# Altium PCB FMC-320U-B3.PcbDoc
Units mil, origin at the board's own origin, x right, y up, seen from the top; angles counter-clockwise.
Board outline 3385.83 x 3385.83 mil, 2 copper layers (Top Layer, Bottom Layer), stack 65.8 mil thick; 57 components, 35 nets, 179 pads, 49 vias.
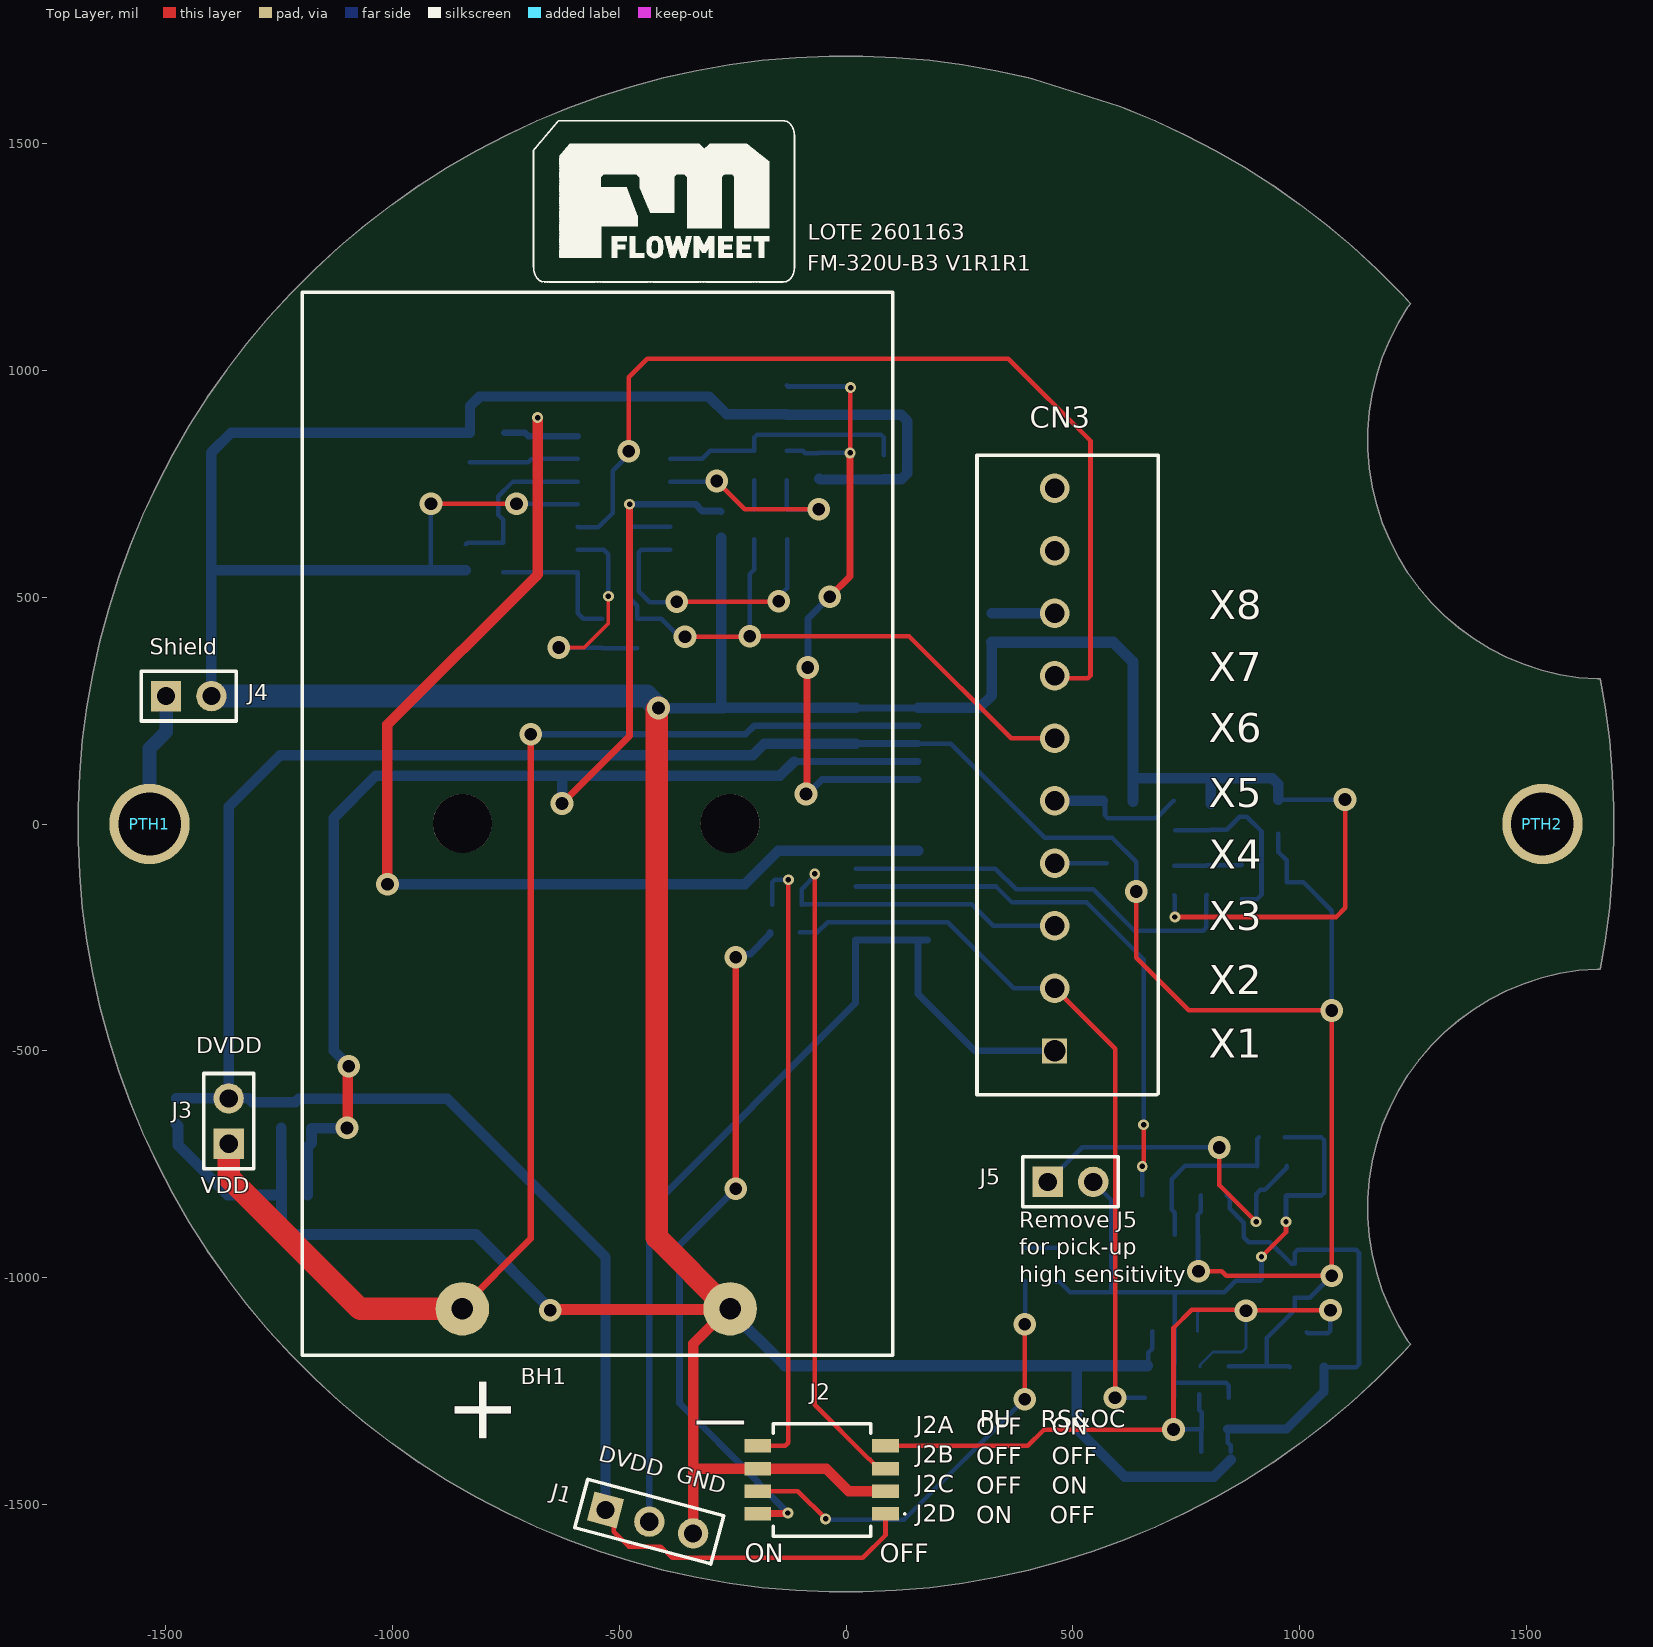
[diagram p0: Top Layer view]
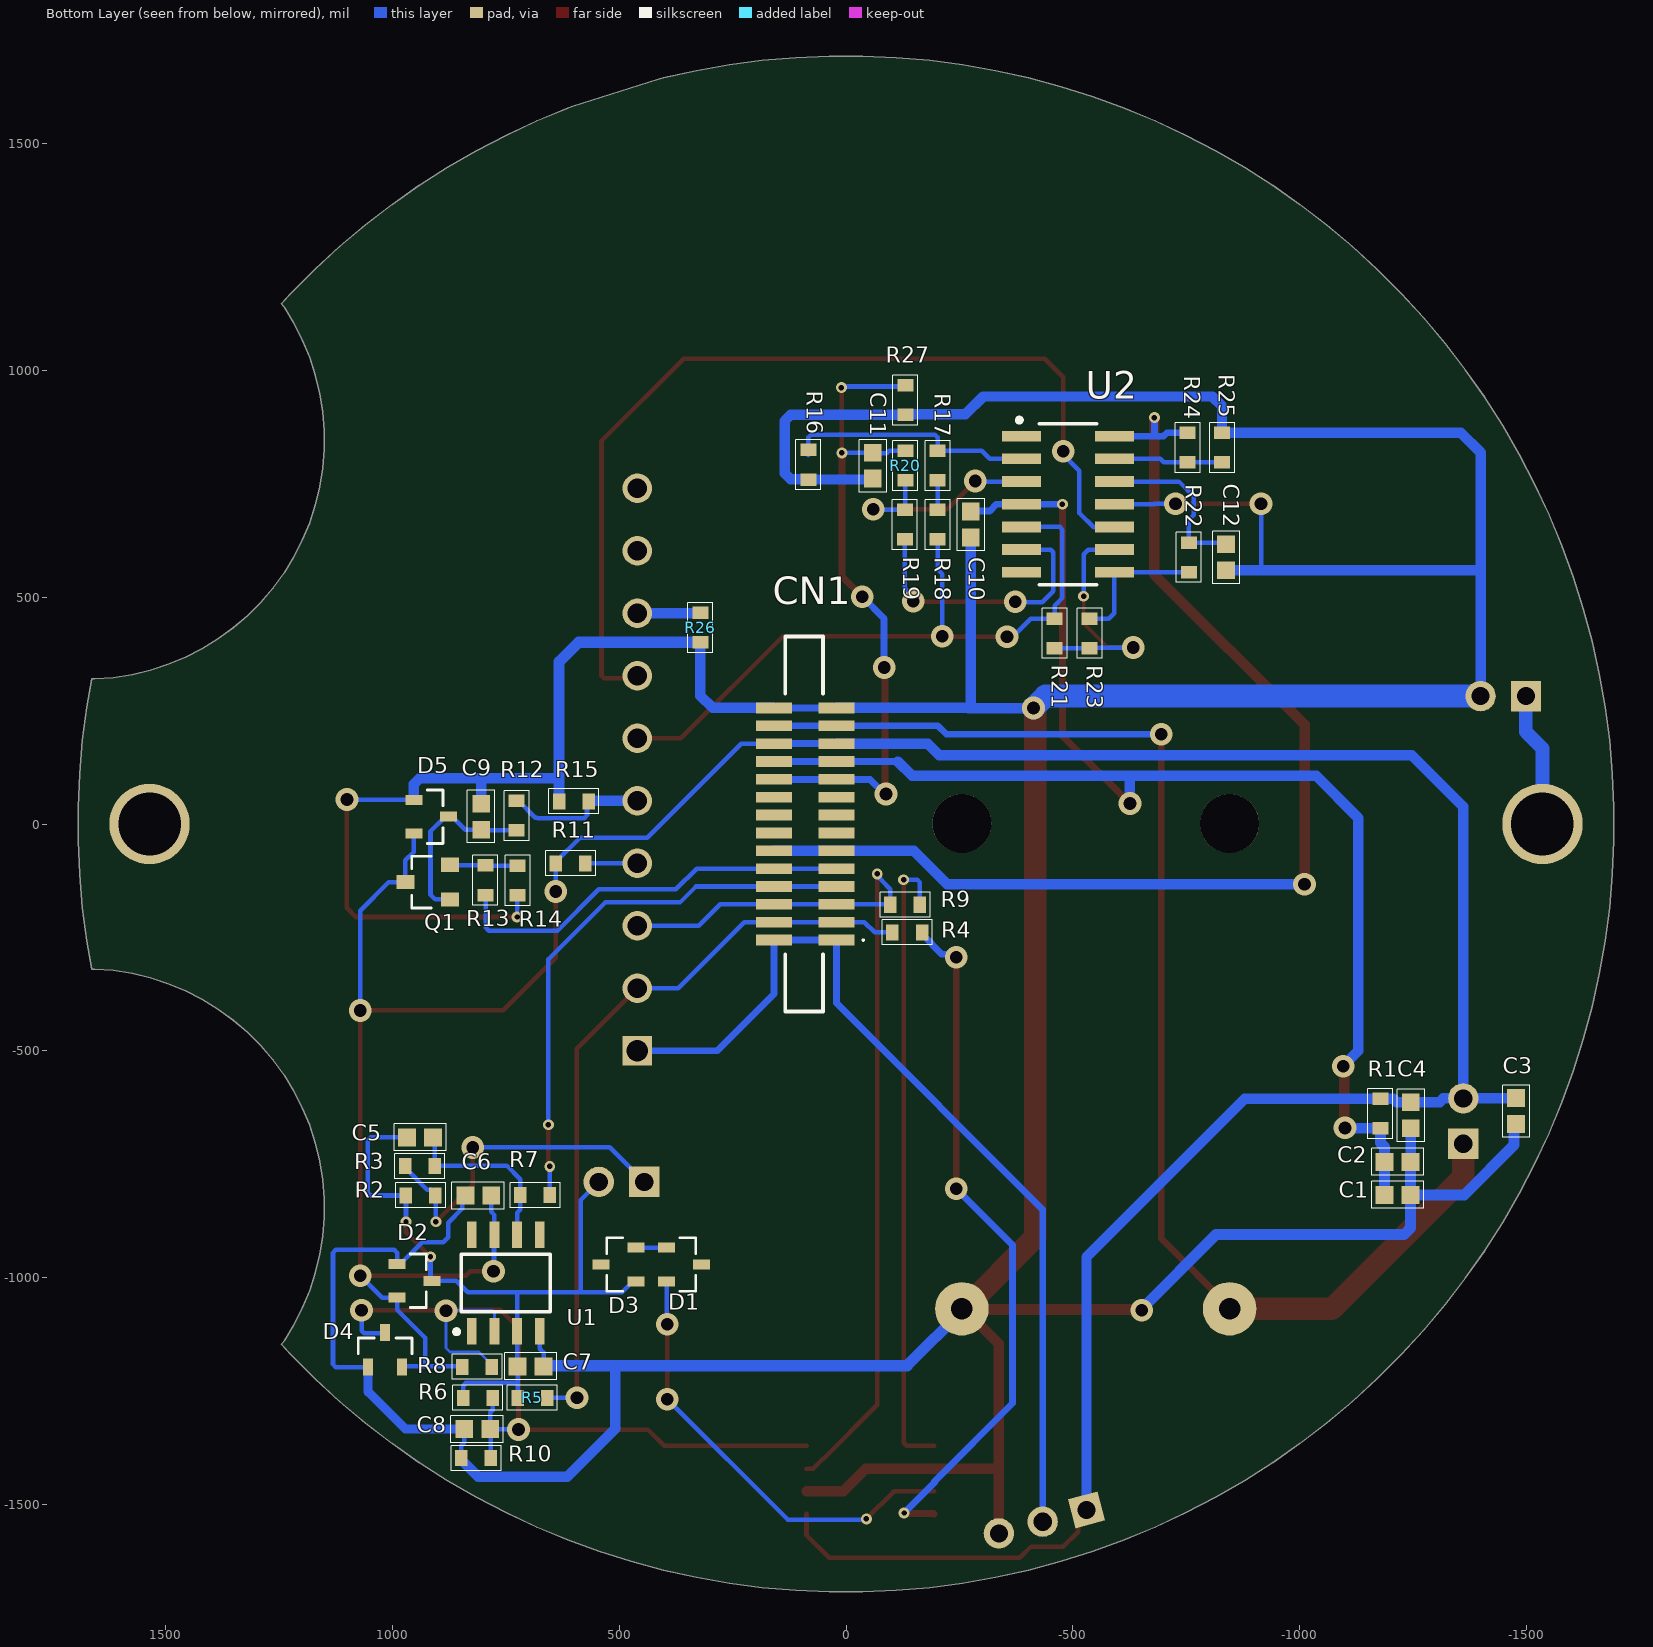
[diagram p1: Bottom Layer view, seen from below]
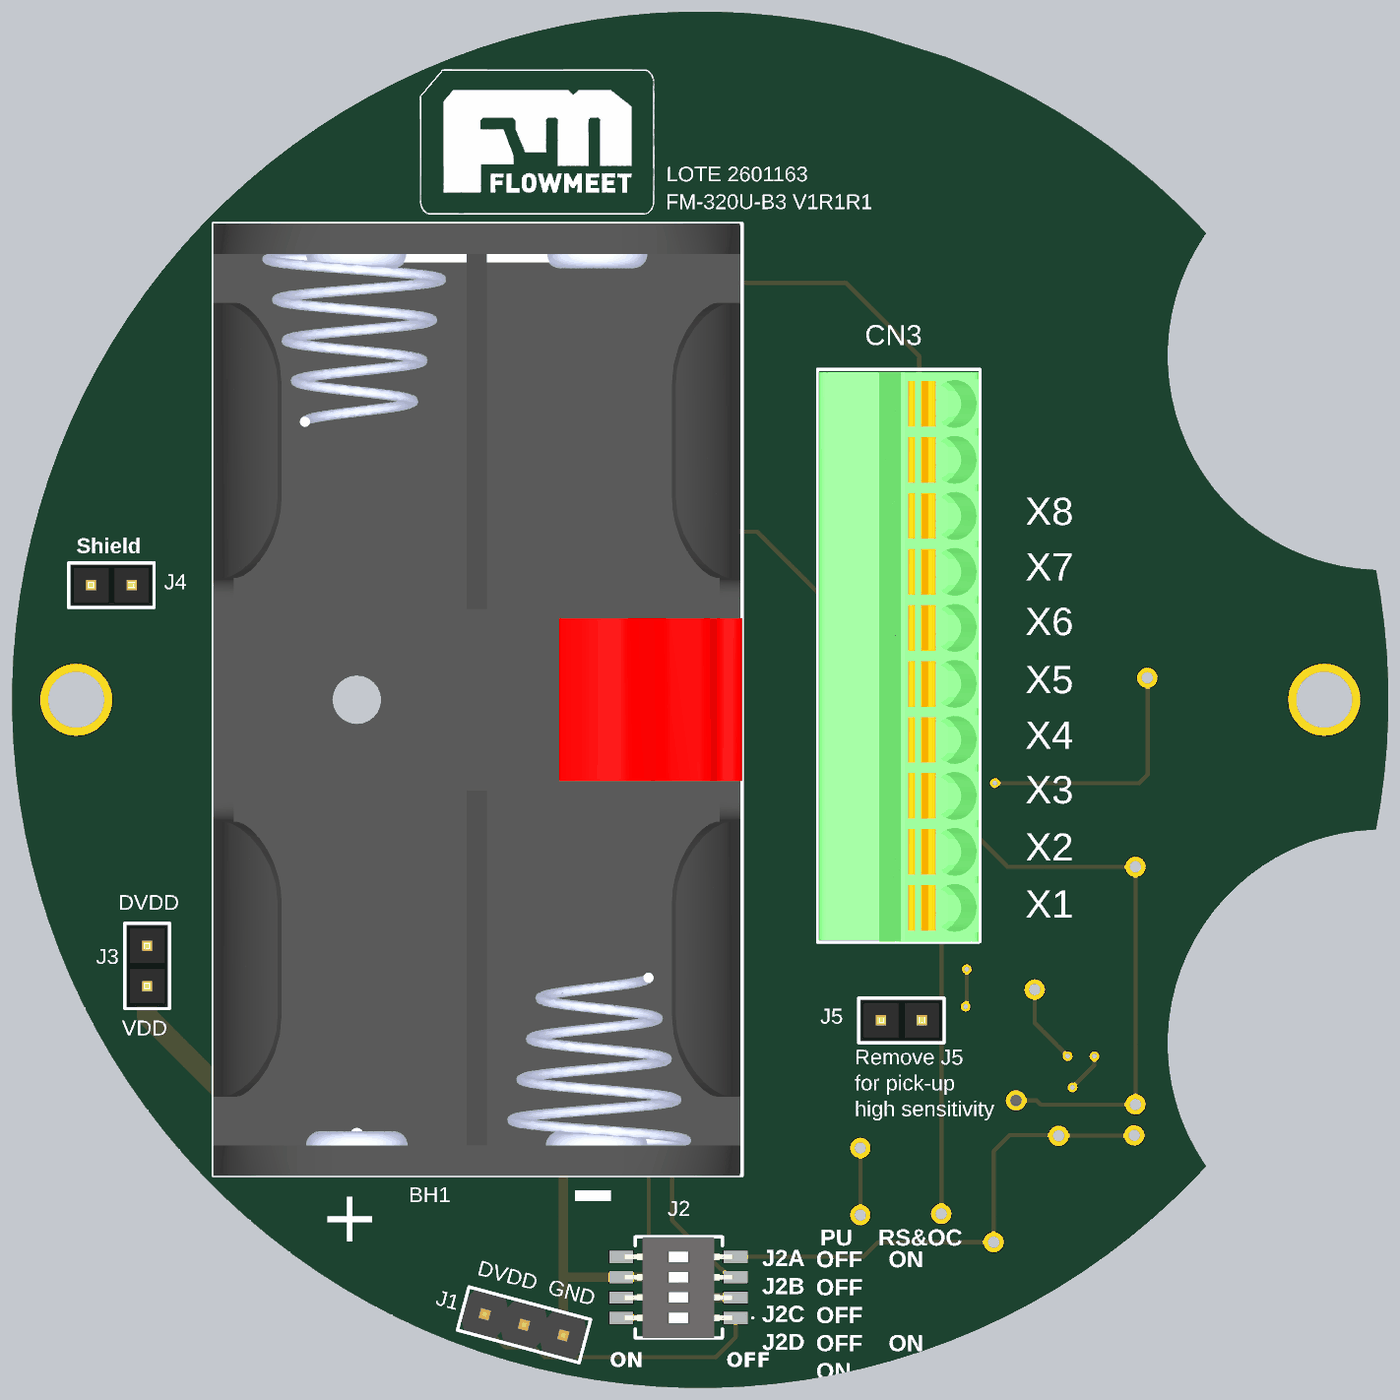
[diagram p2: 3D render of the assembled board from above, using the file's embedded part models]

## Layer stack, top to bottom
Top Solder: solder mask 0.4, Solder Resist, Dk 3.5
Top Layer: signal copper 1.4
Dielectric 1: dielectric 63, FR-4, Dk 4.8
Bottom Layer: signal copper 1.4
Bottom Solder: solder mask 0.4, Solder Resist, Dk 3.5

## Board outline
-1365.57,-1001.27 -1407.94,-940.76 -1447.64,-878.45 -1484.58,-814.47 -1518.69,-748.93 -1549.91,-681.98 -1578.18,-613.72 -1603.45,-544.3 -1625.67,-473.84 -1644.79,-402.48 -1660.78,-330.35 -1673.61,-257.59 -1683.25,-184.35 -1689.69,-110.75 -1692.91,-36.94 -1692.91,36.94 -1689.69,110.75 -1683.25,184.35 -1673.61,257.59 -1660.78,330.35 -1644.79,402.48 -1625.67,473.84 -1603.45,544.3 -1578.18,613.72 -1549.91,681.98 -1518.69,748.93 -1484.58,814.47 -1447.64,878.45 -1407.94,940.76 -1365.57,1001.27 -1320.59,1059.89 -1273.1,1116.48 -1223.19,1170.95 -1170.95,1223.19 -1116.48,1273.1 -1059.89,1320.59 -1001.27,1365.57 -940.76,1407.94 -878.45,1447.64 -814.47,1484.58 -748.93,1518.69 -681.98,1549.91 -613.72,1578.18 -544.3,1603.45 -473.84,1625.67 -402.48,1644.79 -330.35,1660.78 -257.59,1673.61 -184.35,1683.25 -110.75,1689.69 -36.94,1692.91 36.94,1692.91 110.75,1689.69 184.35,1683.25 257.59,1673.61 330.35,1660.78 402.48,1644.79 414.11,1641.67 602.4,1582.3 613.72,1578.18 681.98,1549.91 748.93,1518.69 814.47,1484.58 878.45,1447.64 940.76,1407.94 1001.27,1365.57 1059.89,1320.59 1116.48,1273.1 1170.95,1223.19 1223.19,1170.95 1244.72,1147.45 1238.83,1139.34 1217.2,1104.05 1198.41,1067.16 1182.57,1028.92 1169.78,989.55 1160.12,949.3 1153.64,908.42 1150.39,867.15 1150.39,825.76 1153.64,784.49 1160.12,743.61 1169.78,703.36 1182.57,663.99 1198.41,625.75 1217.2,588.87 1238.83,553.57 1263.16,520.08 1290.05,488.61 1319.32,459.34 1350.79,432.45 1384.28,408.12 1419.57,386.5 1456.46,367.7 1494.7,351.86 1534.07,339.07 1574.32,329.41 1615.2,322.93 1656.47,319.69 1662.66,319.69 1673.61,257.59 1683.25,184.35 1689.69,110.75 1692.91,36.94 1692.91,-36.94 1689.69,-110.75 1683.25,-184.35 1673.61,-257.59 1662.66,-319.68 1656.47,-319.68 1615.2,-322.93 1574.32,-329.4 1534.07,-339.06 1494.7,-351.86 1456.45,-367.7 1419.57,-386.49 1384.28,-408.12 1350.79,-432.45 1319.31,-459.33 1290.04,-488.6 1263.16,-520.08 1238.83,-553.57 1217.2,-588.86 1198.41,-625.75 1182.56,-663.99 1169.77,-703.36 1160.11,-743.61 1153.63,-784.49 1150.39,-825.76 1150.39,-867.15 1153.63,-908.42 1160.11,-949.31 1169.77,-989.56 1182.56,-1028.92 1198.41,-1067.17 1217.2,-1104.05 1238.83,-1139.35 1244.72,-1147.46 1223.19,-1170.95 1170.95,-1223.19 1116.48,-1273.1 1059.89,-1320.59 1001.27,-1365.57 940.76,-1407.94 878.45,-1447.64 814.47,-1484.58 748.93,-1518.69 681.98,-1549.91 613.72,-1578.18 544.3,-1603.45 473.84,-1625.67 402.48,-1644.79 330.35,-1660.78 257.59,-1673.61 184.35,-1683.25 110.75,-1689.69 36.94,-1692.91 -36.94,-1692.91 -110.75,-1689.69 -184.35,-1683.25 -257.59,-1673.61 -330.35,-1660.78 -402.48,-1644.79 -473.84,-1625.67 -544.3,-1603.45 -613.72,-1578.18 -681.98,-1549.91 -748.93,-1518.69 -814.47,-1484.58 -878.45,-1447.64 -940.76,-1407.94 -1001.27,-1365.57 -1059.89,-1320.59 -1116.48,-1273.1 -1170.95,-1223.19 -1223.19,-1170.95 -1273.1,-1116.48 -1320.59,-1059.89

## Design rules (kind name [scope] priority, off if disabled: settings)
BoardOutlineClearance [All] p1: gap=10 ignorepadtopadclearanceinfootprint=FALSE except(0: Arc-SplitContinuation Track-SplitContinuation SMDPad-SplitContinuation THPad-SplitContinuation Via-SplitContinuation Fill-SplitContinuation Poly-SplitContinuation Region-SplitContinuation Text-SplitContinuation)
Clearance [All] p1: gap=5 ignorepadtopadclearanceinfootprint=FALSE
HoleSize [All] p1: absolutevalues=TRUE maxlimit=235 minlimit=6 maxpercent=80.000 minpercent=20.000
MinimumSolderMaskSliver [All] p1: minsoldermaskwidth=4
NetAntennae [All] p1: netantennaetolerance=1
PolygonConnect [All] p1: connectstyle=Relief reliefconductorwidth=10 reliefentries=4 polygonreliefangle="90 Angle" airgapwidth=10
RoutingVias [All] p1: holewidth=12 width=16 viastyle="Through Hole" minholewidth=28 minwidth=50 maxholewidth=12 maxwidth=24 useviatemplates=TRUE viatemplateguid#1={D2A74B72-ABBE-4838-B669-26F2FDF580A0} viatemplateguid#2={F812F11A-1244-4D37-B68B-2556282CB982} viatemplatename#1=v61h30 viatemplatename#2=v127h71
SilkToSolderMaskClearance [IsPad] p1: minsilkscreentomaskgap=5 clearancetoexposedcopper=TRUE
SolderMaskExpansion [All] p1: expansion=2 istentingtop=FALSE
Width [All] p1: maxlimit=100 minlimit=5 preferedwidth=7
26 further rules are at their usual default settings.

## Components (designator, comment, footprint, x,y, rotation, side; value= is the part's Value field where it differs from the comment)
BH1 "2462" BATTERY_HOLDER_2XAA -550,0 r270 top
C1 "1uF" CAP_SM0603_YAGEOCC2_N -1216,-818 r180 bottom
C2 "100nF" CAP_SM0603_YAGEOCC2_N -1216,-745 r180 bottom
C3 "1uF" CAP_SM0603_YAGEOCC2_N -1477,-633 r270 bottom
C4 "100nF" CAP_SM0603_YAGEOCC2_N -1245,-642 r270 bottom
C5 "33pF" CAP_SM0603_YAGEOCC2_N 939,-691 r180 bottom
C6 "1uF" CAP_SM0603_YAGEOCC2_N 810.62,-819 r0 bottom
C7 "47nF" CAP_SM0603_YAGEOCC2_N 695.38,-1196 r180 bottom
C8 "47nF" CAP_SM0603_YAGEOCC2_N 813,-1334 r0 bottom
C9 "100nF" CAP_SM0603_YAGEOCC2_N 804,16 r90 bottom
C10 "100nF" CAP_SM0603_YAGEOCC2_N -275,660 r270 bottom
C11 "100nF" CAP_SM0603_YAGEOCC2_N -59,790 r270 bottom
C12 "10nF" CAP_SM0603_YAGEOCC2_N -838,588 r270 bottom
CN1 "F1003-V-14-25T-R" F1003-V-14-25T-R 90,0 r90 bottom locked
CN3 "KF250NH-3.5-10P" KF250NH-3.5-10P 460,-500 r90 top locked
D1 "BAV23S" BAV23S 357,-971 r180 bottom
D2 "BAV23S" BAV23S 951.39,-1007 r180 bottom
D3 "BAV23S" BAV23S 501.39,-971.4 r0 bottom
D4 "BAV23S" BAV23S 1016,-1159 r90 bottom
D5 "BAV23S" BAV23S 914.39,16 r180 bottom
J1 "54101-T0600LF-CUT-3" "HEADER PIN 1X3" -433.59,-1538.12 r345 top
J2 "DSHP04TSGER_1" DSHP04TSGER -34,-1446 r90 top
J3 "54101-T0600LF-CUT-2" "HEADER PIN 1X2" -1361,-655 r90 top
J4 "54101-T0600LF-CUT-2" "HEADER PIN 1X2" -1449,282 r0 top
J5 "54101-T0600LF-CUT-2" "HEADER PIN 1X2" 495,-789 r0 top
PTH1 "PTH-3MM-L" PTH_M3_L -1535.43,0 r0 top
PTH2 "PTH-3MM-L" PTH_M3_L 1535.43,0 r0 top
Q1 "DMG3401LSN-7" DMG3401LSN-7 928,-128 r0 bottom
R1 "10R" RES_SM0603_YAGEORC_N -1178,-638.56 r270 bottom
R2 "1M" RES_SM0603_YAGEORC_N 937.56,-819 r180 bottom
R3 "1M" RES_SM0603_YAGEORC_N 939.44,-754 r180 bottom
R4 "100K" RES_SM0603_YAGEORC_N -135,-239 r180 bottom
R5 "10K" RES_SM0603_YAGEORC_N 691.44,-1265 r0 bottom
R6 "220K" RES_SM0603_YAGEORC_N 811.56,-1265 r0 bottom
R7 "1K" RES_SM0603_YAGEORC_N 685.44,-818 r180 bottom
R8 "1M" RES_SM0603_YAGEORC_N 813,-1197 r0 bottom
R9 "10K" RES_SM0603_YAGEORC_N -130.44,-178 r180 bottom
R10 "1M" RES_SM0603_YAGEORC_N 815.56,-1398 r180 bottom
R11 "1K" RES_SM0603_YAGEORC_N 607,-87 r0 bottom
R12 "100K" RES_SM0603_YAGEORC_N 726,18.56 r270 bottom
R13 "1K" RES_SM0603_YAGEORC_N 795,-124 r270 bottom
R14 "1M" RES_SM0603_YAGEORC_N 724,-124.56 r90 bottom
R15 "100K" RES_SM0603_YAGEORC_N 600,50 r180 bottom
R16 "200k" RES_SM0603_YAGEORC_N 83,792 r90 bottom
R17 "100K" RES_SM0603_YAGEORC_N -202,790 r270 bottom
R18 "2.49K" RES_SM0603_YAGEORC_N -202,660 r90 bottom
R19 "100K" RES_SM0603_YAGEORC_N -130,660 r90 bottom
R20 "100K" RES_SM0603_YAGEORC_N -131,790 r90 bottom
R21 "100K" RES_SM0603_YAGEORC_N -460,420 r90 bottom
R22 "1K" RES_SM0603_YAGEORC_N -756,588 r90 bottom
R23 "100K" RES_SM0603_YAGEORC_N -537,420 r90 bottom
R24 "82K" RES_SM0603_YAGEORC_N -753,830 r90 bottom
R25 "10K" RES_SM0603_YAGEORC_N -829,830 r270 bottom
R26 "0" RES_SM0603_YAGEORC_N 321,433 r90 bottom
R27 "100K" RES_SM0603_YAGEORC_N -131,934.56 r90 bottom
U1 "MCP6541" MCP6541-E/SN 750,-1011.92 r90 bottom
U2 "GS8044" GS8044-SR -489.36,705 r180 bottom

## Footprints (in the part's own frame and the unit in brackets; to place one, negate y for a bottom-side part, rotate by r counter-clockwise, add the part's x,y. Pads: shape width x height; smd on the part's side, far side on the other; paste and mask are expansions set on the pad)
BATTERY_HOLDER_2XAA [mm]
  round 3 hole 1.2 mask+0.15: NEG(27.15,7.481) POS(27.15,-7.509)
  round 3.3 hole 3.3 unplated mask+0.15: ""(-0.03,7.481) ""(-0.03,-7.509)
  silkscreen extent -29.77,-16.47 29.74,16.59, body extent -29.76,-16.46 29.76,16.59, height 17.02
BAV23S [mm]
  rect 0.95x0.56 smd: 1(-0.975,0.95) 2(-0.975,-0.95) 3(0.975,0)
  silkscreen extent -0.23,-1.5 0.66,1.5, body extent -1.2,-1.46 1.2,1.46, height 1.2
CAP_SM0603_YAGEOCC2_N [mm] "Capacitor, Yageo CC Class2, SM0603, IPC Medium Density"
  rect 1x1 smd: 1(-0.727,0) 2(0.727,0)
  silkscreen extent -1.45,-0.75 1.48,0.77, body extent -0.9,-0.5 0.9,0.5, height 0.9
DMG3401LSN-7 [mm]
  rect 1x0.8 smd: D(1.1,0) G(-1.4,0.975) S(-1.4,-0.975)
  silkscreen extent -0.35,-1.45 0.75,1.45, body extent -1.68,-1.55 1.32,1.55, height 1.45
DSHP04TSGER [mm]
  rect 0.76x1.5 smd: A1(-1.905,-3.075) A2(-0.635,-3.075) A3(0.635,-3.075) A4(1.905,-3.075) B1(-1.905,4.075) B2(-0.635,4.075) B3(0.635,4.075) B4(1.905,4.075)
  silkscreen extent -3.16,-4.2 3.16,3.2, body extent -3.16,-2.85 3.15,3.85, height 1.65
F1003-V-14-25T-R [mm]
  rect 0.6x2 smd: A1(-6.5,-1.75) A2(-5.5,-1.75) A3(-4.5,-1.75) A4(-3.5,-1.75) A5(-2.5,-1.75) A6(-1.5,-1.75) A7(-0.5,-1.75) A8(0.5,-1.75) A9(1.5,-1.75) A10(2.5,-1.75) A11(3.5,-1.75) A12(4.5,-1.75) A13(5.5,-1.75) A14(6.5,-1.75) B1(-6.5,1.75) B2(-5.5,1.75) B3(-4.5,1.75) B4(-3.5,1.75) B5(-2.5,1.75) B6(-1.5,1.75) B7(-0.5,1.75) B8(0.5,1.75) B9(1.5,1.75) B10(2.5,1.75) B11(3.5,1.75) B12(4.5,1.75) B13(5.5,1.75) B14(6.5,1.75)
  silkscreen extent -10.5,-3.3 10.5,1.12, body extent -10.5,-2.69 10.5,2.69, height 5.7
GS8044-SR [mm]
  rect 2.2x0.6 smd: 1(-2.6,3.81) 2(-2.6,2.54) 3(-2.6,1.27) 4(-2.6,0) 5(-2.6,-1.27) 6(-2.6,-2.54) 7(-2.6,-3.81) 8(2.6,-3.81) 9(2.6,-2.54) 10(2.6,-1.27) 11(2.6,0) 12(2.6,1.27) 13(2.6,2.54) 14(2.6,3.81)
  silkscreen extent -2.85,-4.5 1.6,4.83, body extent -3,-4.32 3,4.32, height 1.75
"HEADER PIN 1X2" [mm]
  rect 1.7x1.7 hole 1.02: 1(-1.27,0)
  round 1.7 hole 1.02: 2(1.27,0)
  silkscreen extent -2.67,-1.4 2.67,1.4, body extent -2.54,-1.27 2.54,1.27, height 8.49
"HEADER PIN 1X3" [mm]
  rect 1.7x1.7 hole 1.02: 1(-2.54,0)
  round 1.7 hole 1.02: 2(0,0) 3(2.54,0)
  silkscreen extent -3.94,-1.4 3.94,1.4, body extent -3.81,-1.27 3.81,1.27, height 8.57
KF250NH-3.5-10P [mm]
  rect 1.4x1.4 / inner round 1.65 / far side rect 1.65x1.65 hole 1.2: 1(0,0)
  round 1.65 hole 1.1: 2(3.5,0) 3(7,0) 4(10.5,0) 5(14,0) 6(17.5,0) 7(21,0) 8(24.5,0) 9(28,0) 10(31.5,0)
  silkscreen extent -2.45,-5.8 33.35,4.35, body extent -2.43,-5.72 33.17,4.28, height 12.45
MCP6541-E/SN [mm]
  rect 1.5x0.55 smd: 1(-2.7,1.905) 2(-2.7,0.635) 3(-2.7,-0.635) 4(-2.7,-1.905) 5(2.7,-1.905) 6(2.7,-0.635) 7(2.7,0.635) 8(2.7,1.905)
  silkscreen extent -2.85,-2.5 1.6,2.88, body extent -3,-2.45 3,2.45, height 1.75
PTH_M3_L [mm]
  round 4.5 hole 3.5: 1(0,0)
RES_SM0603_YAGEORC_N [mm] "Resistor, Yageo RC_L, SM0603, IPC Medium Density"
  rect 0.7x0.9 smd: 1(-0.827,0) 2(0.827,0)
  silkscreen extent -1.4,-0.7 1.4,0.7, body extent -0.85,-0.45 0.85,0.45, height 0.55

## Part data
BH1: "Battery holder 2XAA TH", Manufacturer=Keystone, Temperature Max=-, Category="Battery holder", Datasheet=https://www.keyelco.com/userAssets/file/M65p28.pdf, Manufacturer part number=2462, Temperature Min=-
C1 C3 C6: library part CC0603KRX7R6BB105, "CAP 1uF SM0603 X7R 10V YAGEO CC2", Manufacturer=Yageo, Package=0603, Tolerance (%)=5, Voltage Rating (Volts)=50, Category=Capacitor, ComponentLink1Description="Manufacturer Website", ComponentLink1URL=http://www.yageo.com, Datasheet=https://datasheet.lcsc.com/lcsc/2304140030_YAGEO-CC0603KRX7R6BB105_C113807.pdf, Manufacturer part number=CC0603KRX7R6BB105
C2 C4 C9 C10 C11: library part CC0603KRX7R9BB104, "CAP 100nF SM0603 X7R 50V YAGEO CC2", Manufacturer=Yageo, Package=0603, Supplier Part Number 1=1362556, Tolerance (%)=10, Voltage Rating (Volts)=50, Category=Capacitor, ComponentLink1Description="Manufacturer Website", ComponentLink1URL=http://www.yageo.com, Datasheet=https://datasheet.lcsc.com/lcsc/2211101700_YAGEO-CC0603KRX7R9BB104_C14663.pdf, Manufacturer part number=CC0603KRX7R9BB104, Supplier 1=Farnell, Supplier 2=Digi-Key, Supplier Part Number 2=311-1344-1-ND
C5: library part CC0603JRNPO9BN330, "CAP 33pF SM0603 NPO 50V YAGEO CC2", Manufacturer=Yageo, Package=0603, Supplier Part Number 1=722029, Tolerance (%)=5, Voltage Rating (Volts)=50, Category=Capacitor, ComponentLink1Description="Manufacturer Website", ComponentLink1URL=http://www.yageo.com, Manufacturer part number=CC0603JRNPO9BN330, Supplier 1=Farnell, Supplier 2=Digi-Key, Supplier Part Number 2=311-1064-1-ND
C7 C8: library part CC0603JRX7R7BB473, "CAP 47nF SM0603 X7R 16V YAGEO", Manufacturer=Yageo, Package=0603, Tolerance=5, Category=Capacitor, ComponentLink1Description="Manufacturer Website", ComponentLink1URL=http://www.yageo.com, Manufacturer part number=CC0603JRX7R7BB473
C12: library part CC0603KRX7R9BB103, "CAP 10nF SM0603 X7R 50V YAGEO CC2", Manufacturer=Yageo, Package=0603, Supplier Part Number 1=722236, Tolerance (%)=10, Voltage Rating (Volts)=50, Category=Capacitor, ComponentLink1Description="Manufacturer Website", ComponentLink1URL=http://www.yageo.com, Manufacturer part number=CC0603KRX7R9BB103, Supplier 1=Farnell, Supplier 2=Digi-Key, Supplier Part Number 2=311-1085-1-ND
CN1: "14 Position FFC, FPC Connector Contacts, Vertical - 1 Sided 0.039\" (1.00mm) Surface Mount", Manufacturer=XFCN, Vendor Part Number=C2764805, Manufacturer part number=F1003-V-14-25T-R, Vendor=LCSC
CN3: "PCB Terminal Block 1752188", Manufacturer=cixi_kefa_elec, Vendor Part Number=C976564, Manufacturer part number=KF250NH-3.5-10P, Price=1.22, Vendor=LCSC
D1 D2 D3 D4 D5: "DIODE ARRAY GP 250V 200MA SOT23", Manufacturer=onsemi, Temperature Max=150, Temperature Min=-55, Category=Diodo, Datasheet=https://www.onsemi.com/pdf/datasheet/bav23s-d.pdf, Manufacturer part number=BAV23S
J1: "Pin header pitch 2.54 TH - cuttable 3 od 36 positions.", Manufacturer="Amphenol ICC", Manufacturer part number=54101-T0600LF, Fraction=3/36
J2: "DIP Switches / SIP Switches 4pos 0.025A 24VDC 1/2 Pitch", Manufacturer=Kangshen, Manufacturer part number=DSHP04TSGER, Vendor Part Number=C3293144, Vendor=LCSC
J3 J4 J5: "Pin header pitch 2.54 TH - cuttable 2 od 36 positions.", Manufacturer="Amphenol ICC", Manufacturer part number=54101-T0600LF, Fraction=2/36
PTH1 PTH2: "Montaje M3. algo de holgura y buena corona.", Temperature Max=-, Category="Mounting Hole", Temperature Min=-
Q1: "P-CHANNEL ENHANCEMENT MODE MOSFET / RDS(ON) = 85mΩ @ VGS = -2.5V -> ID -2.7A / V(BR)DDS 30V", Manufacturer="Diodes Incorporated", Temperature Max=150, Temperature Min=-55, Category="Transistor mosfet", Datasheet=https://www.diodes.com/assets/Datasheets/DMG3401LSN.pdf, Manufacturer part number=DMG3401LSN-7
R1: library part RC0603FR-0710RL, "RES 10R SM0603 YAGEO RC_L", Manufacturer=Yageo, Package=0603, Power (Watts)=0.1, Resistance (Ohms)=10, Supplier Part Number 1=9238247, Tolerance (%)=1, Category=Resistor, ComponentLink1Description="Manufacturer Website", ComponentLink1URL=http://www.yageo.com, Manufacturer part number=RC0603FR-0710RL, Supplier 1=Farnell, Supplier 2=Digi-Key, Supplier Part Number 2=311-10.0HRCT-ND
R2 R3 R8 R10 R14: library part RC0603FR-071ML, "RES 1M SM0603 YAGEO RC_L", Manufacturer=Yageo, Package=0603, Power (Watts)=0.1, Resistance (Ohms)=1000000, Supplier Part Number 1=9238840, Tolerance (%)=1, Category=Resistor, ComponentLink1Description="Manufacturer Website", ComponentLink1URL=http://www.yageo.com, Datasheet=https://www.yageo.com/upload/media/product/productsearch/datasheet/rchip/PYu-RC_Group_51_RoHS_L_12.pdf, Manufacturer part number=RC0603FR-071ML, Supplier 1=Farnell, Supplier 2=Digi-Key, Supplier Part Number 2=311-1.00MHRCT-ND
R4 R12 R15 R17 R19 R20 R21 R23 R27: library part RC0603FR-13100KL, "RES 100K SM0603 YAGEO RC_L", Manufacturer=Yageo, Package=0603, Power (Watts)=0.1, Resistance (Ohms)=100000, Supplier Part Number 1=2309107, Tolerance (%)=1, Category=Resistor, ComponentLink1Description="Manufacturer Website", ComponentLink1URL=http://www.yageo.com, Manufacturer part number=RC0603FR-13100KL, Supplier 1=Farnell, Supplier 2=Digi-Key
R5 R9 R25: library part RC0603FR-0710KL, "RES 10K SM0603 YAGEO RC_L", Manufacturer=Yageo, Package=0603, Power (Watts)=0.1, Resistance (Ohms)=10000, Supplier Part Number 1=9238603, Tolerance (%)=1, Category=Resistor, ComponentLink1Description="Manufacturer Website", ComponentLink1URL=http://www.yageo.com, Manufacturer part number=RC0603FR-0710KL, Supplier 1=Farnell, Supplier 2=Digi-Key, Supplier Part Number 2=311-10.0KHRCT-ND
R6: library part RC0603FR-07220KL, "RES 220K SM0603 YAGEO RC_L", Manufacturer=Yageo, Package=0603, Power (Watts)=0.1, Resistance (Ohms)=220000, Supplier Part Number 1=9238760, Tolerance (%)=1, Category=Resistor, ComponentLink1Description="Manufacturer Website", ComponentLink1URL=http://www.yageo.com, Manufacturer part number=RC0603FR-07220KL, Supplier 1=Farnell, Supplier 2=Digi-Key, Supplier Part Number 2=311-220KHRCT-ND
R7 R11 R13 R22: library part RC0603FR-071KL, "RES 1K SM0603 YAGEO RC_L", Manufacturer=Yageo, Package=0603, Power (Watts)=0.1, Resistance (Ohms)=1000, Supplier Part Number 1=9238484, Tolerance (%)=1, Category=Resistor, ComponentLink1Description="Manufacturer Website", ComponentLink1URL=http://www.yageo.com, Manufacturer part number=RC0603FR-071KL, Supplier 1=Farnell, Supplier 2=Digi-Key, Supplier Part Number 2=311-1.00KHRCT-ND
R16: library part RC0603FR-07200KL, "RES 200K SM0603 YAGEO RC_L", Manufacturer=Yageo, Package=0603, Power (Watts)=0.1, Resistance (Ohms)=200000, Tolerance (%)=1, Category=Resistor, ComponentLink1Description="Manufacturer Website", ComponentLink1URL=http://www.yageo.com, Manufacturer part number=RC0603FR-07200KL
R18: library part RC0603FR-072K49L, "RES 2K49 SM0603 YAGEO RC_L", Manufacturer=Yageo, Package=0603, Power (Watts)=0.1, Resistance (Ohms)=2490, Tolerance (%)=1, Category=Resistor, ComponentLink1Description="Manufacturer Website", ComponentLink1URL=http://www.yageo.com, Datasheet=https://www.yageo.com/upload/media/product/app/datasheet/rchip/pyu-rc_group_51_rohs_l.pdf, Manufacturer part number=RC0603FR-072K49L
R24: library part RC0603FR-0782KL, "RES 82K SM0603 YAGEO RC_L", Manufacturer=Yageo, Package=0603, Power (Watts)=0.1, Resistance (Ohms)=82000, Supplier Part Number 1=9238719, Tolerance (%)=1, Category=Resistor, ComponentLink1Description="Manufacturer Website", ComponentLink1URL=http://www.yageo.com, Manufacturer part number=RC0603FR-0782KL, Supplier 1=Farnell, Supplier 2=Digi-Key, Supplier Part Number 2=311-82.0KHRCT-ND
R26: library part RC0603FR-070RL, "RES 0 OHMS SM0603 YAGEO RC_L", Manufacturer=Yageo, Package=0603, Power (Watts)=0.1, Supplier Part Number 1=9238484, Tolerance (%)=1, Category=Resistor, ComponentLink1Description="Manufacturer Website", ComponentLink1URL=http://www.yageo.com, Datasheet=https://www.yageo.com/upload/media/product/app/datasheet/rchip/pyu-rc_group_51_rohs_l.pdf, Manufacturer part number=RC0603FR-070RL, Resistance (Ohms)=0, Supplier 1=Farnell, Supplier 2=Digi-Key, Supplier Part Number 2=311-1.00KHRCT-ND
U1: library part MCP6541-E/SN, "IC COMP PP I/O SNGL 1.6V 8SOIC", Manufacturer="Microchip Tech", Manufacturer part number=MCP6541-E/SN
U2: library part GS8044-SR, "IC OPAMP GP 4 CIRCUIT 14SOIC", Manufacturer=Gainsil, Manufacturer part number=GS8044-SR, Vendor=LCSC

## Via types
v1: diameter 50, hole 28, Top Layer to Bottom Layer, 34 vias
v2: diameter 24, hole 12, Top Layer to Bottom Layer, 15 vias

## Nets (pads, with @x,y where several pads share a name; then routed paths per layer and width w, separated by ;. In a path a pad name is that pad's centre, name@x,y a point inside that pad or via, vN(x,y) a via of type N, cw(c..) or ccw(c..) an arc to the next point about the centre after c; other vN are vias at no path point)
AVDD: C1.1 C2.1 C10.1 CN1.A11 CN1.B11 R1.2 U2.4 | length 3259.9
  Top Layer w15: v1(-626,45) -477,194 v2(-477,705)
  Top Layer w23: v1(-1100,-670) -1098,-668 -1098,-536 v1(-1096,-534)
  Bottom Layer w10: R1.2 R1.2@-1177.44,-670.56 ; v1@-1100.56,-670.56 v1(-1100,-670)
  Bottom Layer w15: v2(-477,705) U2.4 -332,705 -317,690 -276.38,690 C10.1 ; -114.44,137.8 CN1.A11 CN1.B11
  Bottom Layer w23: R1.2@-1177.44,-670.56 v1@-1100.56,-670.56 ; v1(-1096,-534) -1129.8,-500.2 -1129.8,13.2 -1037,106 -626,106 ; v1(-626,45) -626,106 ; -114.44,137.8 -146.24,106 -626,106
  Bottom Layer w24: C1.1 C2.1 -1187.38,-712.38 -1178,-703 R1.2
blindaje: J4.1 PTH1.1 | length 297.1
  Bottom Layer w30: PTH1.1 -1535.43,166.57 -1499,203 J4.1
DVDD: C3.1 C4.1 C6.1 CN1.A12 CN1.B12 D2.2 D4.2 D5.2 J1.1 J2.A1 J3.2 Q1.D R1.1 R8.2 R11.2 U1.7 | length 7829.1
  Top Layer w10: J1.1 -512.04,-1530.38 -512.04,-1559.96 -479,-1593 -408,-1593 -383,-1618 37,-1618 87.06,-1567.94 J2.A1 ; v1(640,-149) 640,-295 756,-411 v1(1071,-411) v1(1071,-996) 838,-996 828,-986 v1(777,-986)
  Bottom Layer w10: CN1.B12 230.83,177.17 438,-30 586.5,-30 639.56,-83.06 R11.2 639.78,-87.22 639.78,-148.78 v1(640,-149) ; v1(777,-986) 776,-985 776,-906.62 U1.7 775,-862 782,-855 C6.1 ; R8.2@843.56,-1195 928,-1195 ; D5.2 952.77,-61.77 971.31,-80.31 Q1.D 1008,-128 1071,-191 v1(1071,-411) ; D4.2 976.21,-1195 928,-1195 ; v1(1071,-996) 1022.6,-1044.4 D2.2 989.77,-1071.23 928,-1133 928,-1195
  Bottom Layer w15: CN1.A12 CN1.B12
  Bottom Layer w23: C3.1 -1476.38,-605 J3.2 ; J1.1 -530.18,-954.81 -879,-606 R1.1 -1207,-606 -1214.38,-613.38 C4.1 -1308.62,-613.38 -1317,-605 J3.2 ; CN1.A12 -179.83,177.17 -205.5,151.5 -1247.5,151.5 -1361,38 J3.2
FLOW_CMP_OUT: CN1.A4 CN1.B4 R7.2 | length 1222.5
  Top Layer w10: v2(653,-755) 656,-752 v2(656,-663)
  Bottom Layer w10: CN1.A4 CN1.B4 330.8,-137.8 366,-173 531,-173 656,-298 v2(656,-663) ; R7.2 652.94,-817.94 v2(653,-755) v2(653,-755)
FLOW_DETECTOR: CN1.A5 CN1.B5 R13.2 | length 904.6
  Bottom Layer w10: CN1.A5 CN1.B5 329.43,-98.43 375,-144 545,-144 636,-235 787.66,-235 794.52,-228.14 794.52,-157.04 R13.2
FLOW_SENSOR_X1: CN1.A1 CN1.B1 CN3.1 J1.2 | length 2101
  Bottom Layer w15: J1.2 -433.59,-849.59 21.1,-394.9 CN1.A1 CN1.B1 ; CN1.B1@179.65,-255.91 CN1.B1 ; CN3.1 284,-500 158.9,-374.9 CN1.B1
FLOW_SENSOR_X2: CN1.A2 CN1.B2 CN3.2 R4.1 R5.1 | length 1656.2
  Top Layer w10: CN3.2 593.46,-495.67 593.46,-1264.54 v1(593,-1265)
  Bottom Layer w10: R4.1 -63,-239 -40.54,-216.54 CN1.A2 CN1.B2 224.54,-216.54 370.2,-362.2 CN3.2 ; v1(593,-1265) R5.1
FLOW_SENSOR_X3: CN1.A3 CN1.B3 CN3.3 J2.A3 R9.1 | length 2043.7
  Top Layer w10: v2(-69,-110) -69,-1280.64 51.32,-1400.96 52.46,-1400.96 72.5,-1421 J2.A3
  Bottom Layer w10: R9.1@-97.94,-174.06 -94.83,-177.17 CN1.A3 CN1.B3 277.17,-177.17 324.41,-224.41 CN3.3 ; R9.1 -97.94,-177.94 -97.94,-143.51 -80,-125.57 -80,-124.79 -69,-113.79 v2(-69,-110)
FLOW_SWITCH_X4: CN3.4 R11.1 | length 114.6
  Bottom Layer w10: CN3.4 574.06,-86.61 R11.1
FLOW_SWITCH_X5: CN3.5 R12.1 R15.2 | length 309.9
  Bottom Layer w10: R15.2@566.26,51.18 R15.2 571,46.44 571,18.86 576.86,13 680,13 681,14 684.94,14 R12.1@722.06,51.12
  Bottom Layer w23: CN3.5 R15.2@566.26,51.18
FLUID_TEMP_AN: CN1.A6 CN1.B6 R24.2 U2.14 | length 2572.9
  Top Layer w23: v1(-1011,-133) -1011,219 -680,550 v2(-680,896)
  Bottom Layer w15: R24.2 -707.56,862.56 -700,855 -678,855 ; v2(-680,896) -680,857 -678,855 ; U2.14 -678,855
  Bottom Layer w23: v1(-1011,-133) -223,-133 -149.06,-59.06 -111.53,-59.06 CN1.A6 CN1.B6
GND: BH1.NEG C1.2 C2.2 C3.2 C4.2 C6.2 C7.2 C8.2 C9.2 C10.2 C11.2 C12.2 CN1.A14 CN1.B14 D2.1 D4.1 D5.1 J1.3 J2.A2 J2.B3 J4.2 R10.1 R14.1 R15.1 R16.1 R25.1 R26.1 R27.1 U1.4 U2.11 | length 14292
  Top Layer w10: v1(-915,706) v1(-726.5,706) ; v2(725,-205) 1081,-205 1101,-185 1101,53 v1(1100,54)
  Top Layer w23: J1.3 -337,-1421 ; BH1.NEG@-265,-1074.03 -337,-1146.03 -337,-1421 ; J2.A2 6,-1471 -44,-1421 J2.B3 -337,-1421
  Top Layer w24: v1(-652,-1072) -650.45,-1070.45 -261.42,-1070.45 BH1.NEG@-259.87,-1068.9
  Top Layer w50: v1(-413.41,255.59) -417,252 -417,-911.77 BH1.NEG@-259.87,-1068.9
  Bottom Layer w10: -1399,561 -1397.38,559.38 ; v1(-915,706) -915,564.38 -910,559.38 ; v1(-726.5,706) -680,706 -679,705 U2.11 ; -275,259.59 -271,255.59 ; -160.69,259.59 -157,255.91 ; R27.1@-132,903 R27.1 ; C7.2@664.76,-1194 666.83,-1191.93 666.83,-1165.17 675,-1157 U1.4 ; R14.1 725,-158.12 v2(725,-205) ; 727,101 729,103 ; C6.2 845.83,-825.58 845.83,-847.83 877,-879 877,-911 887.91,-921.91 934.41,-921.91 982.09,-969.6 D2.1 989.77,-944.86 995.63,-939 1125.14,-939 1131,-944.86 1131,-1191.53 1125.14,-1197.39 D4.1 ; C8.2 841.62,-1363.62 848.12,-1370.12 R10.1@848.12,-1384 ; R10.1@848.12,-1401.94 R10.1 ; D5.1 953.07,53.7 1099.7,53.7 v1(1100,54)
  Bottom Layer w15: CN1.A14 CN1.B14
  Bottom Layer w20: C8.2 971,-1334 1053.4,-1251.6 D4.1
  Bottom Layer w23: J4.2 -1399,561 -1399,819 -1355.44,862.56 R25.1 -829,920.53 -807.03,942.5 -302.5,942.5 -263,903 R27.1@-132,903 ; -1397.38,559.38 -910,559.38 C12.2 ; v1(-413.41,255.59) -271,255.59 ; -275,259.59 C10.2 ; -271.31,255.91 -157,255.91 CN1.A14 ; R27.1 121.53,902 135,888.53 135,773.19 121.53,759.72 R16.1@83,759.72 ; C11.2 -57.06,759.44 R16.1 ; CN1.B14 294.09,255.91 321,282.81 R26.1 ; 509,-1194 509,-1333 615,-1439 811.06,-1439 R10.1@848.12,-1401.94 ; 632.56,101 727,101 939.3,101 952.77,87.53 D5.1 ; C9.2 804,93
  Bottom Layer w24: C3.2 -1473,-665.62 -1473,-708 -1363,-818 C1.2 ; C4.2 -1245,-744.62 C2.2 C1.2 ; v1(-652,-1072) -652,-1069 -816,-905 -1230.56,-905 -1244.62,-890.94 C1.2
  Bottom Layer w25: BH1.NEG@-259.87,-1068.9 -134.77,-1194 509,-1194 C7.2@664.76,-1194 ; R26.1 589.56,400.44 632.56,357.44 632.56,101 R15.1
  Bottom Layer w50: J4.2 -439.81,282 v1(-413.41,255.59)
NetC5_1: C5.1 C7.1 D2.3 D3.1 J5.2 R2.1 R5.2 R6.2 U1.3 | length 1617.2
  Top Layer w10: v2(916,-954) 970,-900 v2(970,-877)
  Bottom Layer w10: D3.1 470.68,-1008.8 493.87,-1032 585,-1032 ; J5.2 585,-829 585,-1032 ; R5.2 724,-1232.86 ; R6.2 844,-1264.88 844,-1238.14 838.14,-1232.28 724.57,-1232.28 724,-1232.86 ; v2(916,-954) 916,-1004 D2.3 859,-1007 834,-1032 725,-1032 ; C5.1 1048.14,-691 1054,-696.86 1054,-813.14 1048.14,-819 R2.1 R2.1 970.06,-876.94 v2(970,-877) ; 585,-1032 725,-1032 ; 724,-1232.86 C7.1 722,-1194 725,-1191 U1.3 725,-1032
NetC5_2: C5.2 R3.2 R7.1 U1.6 | length 391.7
  Bottom Layer w10: U1.6 725,-857 718,-850 R7.1 718,-783 748,-753 905.88,-753 R3.2 906.88,-694.5 C5.2
NetC8_1: C8.1 D4.3 J2.A4 R6.1 R8.1 R10.2 U1.2 | length 1883.7
  Top Layer w10: J2.A4 401,-1371 437,-1335 v1(722,-1335) 722,-1111 762,-1071 880,-1071 v1(882,-1073) 882.5,-1072.5 1067.5,-1072.5 v1(1068,-1072)
  Bottom Layer w6: U1.2 775,-1077.86 780.86,-1072 881,-1072 v1(882,-1073) 882,-1154.91 872.91,-1164 809.5,-1164 780.44,-1193.06 R8.1
  Bottom Layer w10: v1(722,-1335) 723,-1334 C8.1@783,-1334 ; R6.1@779,-1257 779,-1292 784.38,-1297.38 C8.1 C8.1@783,-1334 ; R10.2@783,-1384 C8.1@783,-1334 ; D4.3 1018.39,-1123 1062.14,-1123 1068,-1117.14 v1(1068,-1072)
NetC9_1: C9.1 D5.3 Q1.G R12.2 | length 402.9
  Bottom Layer w10: R12.2 802.62,-14 C9.1 839.7,-12.62 868.32,16 D5.3 883.68,16 916,-16.32 916,-156 905.61,-166.39 Q1.G
NetC12_1: C12.1 R22.2 U2.12 | length 378.2
  Bottom Layer w10: C12.1 -834.06,620.56 R22.2 -756,670.7 -766.5,681.2 -766.5,722.57 -734.07,755 U2.12
NetD1_1: D1.1 D3.2 | length 67.8
  Bottom Layer w10: D1.1 395.59,-933.8 462.8,-933.8 D3.2
NetD1_2: D1.2 J2.B2 | length 985.6
  Top Layer w10: J2.B2 -106,-1471 v2(-45,-1532) ; v1(394,-1268) 393.14,-1267.14 393.14,-1258.86 394,-1258 v1(394,-1103)
  Bottom Layer w10: v2(-45,-1532) -43,-1534 128,-1534 v1(394,-1268) ; v1(394,-1103) 394,-1101 395.39,-1099.61 D1.2
NetJ2_B1: J2.B1 R4.2 | length 1543.2
  Top Layer w15: v1(-243,-804) v1(-243,-294) ; J2.B1 -193.43,-1520 -129,-1520 v2(-128,-1519)
  Bottom Layer w15: v1(-243,-804) -367,-928 -367,-1277 -194.86,-1449.14 -194.86,-1452.14 v2(-128,-1519) ; v1(-243,-294) -236.3,-287.3 -211.93,-287.3 -167.56,-242.94 R4.2
NetJ2_B4: J2.B4 R9.2 | length 1398.9
  Top Layer w10: J2.B4 -134,-1371 -127,-1364 v2(-127,-123)
  Bottom Layer w10: R9.2 -163,-128.86 -157.14,-123 v2(-127,-123)
NetJ5_1: J5.1 R2.2 R3.1 | length 764
  Top Layer w10: v1(823,-713) 823,-796 v2(904,-877)
  Bottom Layer w10: J5.1 521,-713 v1(823,-713) ; v2(904,-877) 904.5,-876.5 904.5,-819.5 R2.2 905,-815.06 913.78,-806.28 923.65,-806.28 972,-757.94 R3.1
NetQ1_S: Q1.S R13.1 R14.2 | length 149.9
  Bottom Layer w10: R14.2 724.28,-91.72 794.72,-91.72 R13.1 871.06,-91.44 Q1.S
NetR16_2: R16.2 R17.1 U2.2 | length 551.1
  Bottom Layer w10: U2.2 -317,805 -299.44,822.56 R17.1 -202,852.14 -196.14,858 77.14,858 83,852.14 R16.2@83,812.77
NetR17_2: R17.2 R18.2 | length 64.9
  Bottom Layer w10: R18.2 R17.2
NetR19_1: R19.1 U2.6 | length 622.2
  Top Layer w10: v1(-373,490) -149,490 v1(-148,491)
  Bottom Layer w10: U2.6 -451.14,605 -457,599.14 -457,513 -433,489 -374,489 v1(-373,490) ; v1(-148,491) -148,501.82 -130,519.82 R19.1
NetR19_2: R19.2 R20.1 U2.3 | length 489
  Top Layer w10: v1(-285,756) -223,694 v1(-60,694)
  Bottom Layer w10: U2.3 -286,755 v1(-285,756) ; R20.1 -131,693.56 R19.2 -129.28,693.28 -60.72,693.28 v1(-60,694)
NetR21_1: R21.1 R23.1 U2.9 | length 530.5
  Top Layer w8: v1(-633.5,389) -577,389 -524,442 v2(-524,502)
  Bottom Layer w10: v1(-633.5,389) -632.72,388.22 -537.78,388.22 R23.1 R21.1 ; U2.9 -534,605 -524,595 v2(-524,502)
NetR22_1: R22.1 R23.2 U2.8 | length 314.5
  Bottom Layer w10: R22.1 -755.78,555.22 -591.94,555.22 U2.8 -591.72,464.72 -579.56,452.56 R23.2
NetR24_1: R24.1 R25.2 U2.13 | length 240.4
  Bottom Layer w10: R25.2 R24.1 -700.56,797.44 -693,805 U2.13
PT-100_X6: CN3.6 R18.1 R21.2 U2.5 | length 1543.6
  Top Layer w10: v1(-355,413) -213,413 v1(-212,414) 139,414 364.02,188.98 CN3.6
  Bottom Layer w10: U2.5 -471.14,655 -477,649.14 -477,498.34 -460,481.34 R21.2 -407.56,452.56 -368,413 v1(-355,413) ; v1(-212,414) -212,551 -202,561 R18.1
PT-100_X7: CN3.7 U2.10 | length 2116.8
  Top Layer w10: v1(-479,822) -479,985 -438,1026 358,1026 539,845 539,326.86 533.14,321 465.77,321 CN3.7
  Bottom Layer w10: U2.10 -590.72,654 -546,654 -514.5,685.5 -514.5,778.5 -483,810 -483,818 v1(-479,822)
PT-100_X8: CN3.8 R26.2 | length 139.4
  Bottom Layer w10: R26.2 R26.2@321.5,465.06 ; CN3.8@459.5,465.06 CN3.8
  Bottom Layer w23: R26.2@321.5,465.06 CN3.8@459.5,465.06
VDD: BH1.POS CN1.A13 CN1.B13 J3.1 | length 2897.7
  Top Layer w15: BH1.POS@-850.03,-1068.9 -695,-913.87 v1(-695,198)
  Top Layer w50: J3.1 -1361,-779 -1071.1,-1068.9 BH1.POS@-850.03,-1068.9
  Bottom Layer w15: v1(-695,198) -221,198 -202.46,216.54 CN1.B13
VREF+: C11.1 CN1.A10 CN1.B10 R20.2 R27.2 | length 1483.3
  Top Layer w10: v2(9,818) 9.5,818.5 9.5,961.5 v2(10,962)
  Top Layer w15: v1(-88,66) -86,68 -86,343 v1(-84,345) ; v1(-36,501) 9,546 v2(9,818)
  Bottom Layer w10: R20.2 -95.56,822.56 -90,817 -60.62,817 C11.1 8.38,818.62 v2(9,818) ; R27.2 -128.44,964.56 7.44,964.56 v2(10,962)
  Bottom Layer w15: v1(-88,66) -85.68,66 -53.25,98.43 CN1.B10 ; v1(-84,345) -84,453 v1(-36,501)
pads on no net: BH1. CN1.A7 CN1.A8 CN1.A9 CN1.B7 CN1.B8 CN1.B9 CN3.9 CN3.10 D1.3 D3.3 PTH2.1 U1.1 U1.5 U1.8 U2.1 U2.7

## Silkscreen, mask and mechanical layers (free items; w line width, h text height)
Top Overlay:
  drawing of 10 lines, arcs and shapes, not listed
  text "LOTE 2601163" at -84,1275.66 h59.06
  text "FM-320U-B3 V1R1R1" at -85,1207.66 h59.06
  text "X8" at 800,430.22 h110
  text "Shield" at -1535,360.72 h60
  text "X7" at 800,294 h110
  text "X6" at 800,159.22 h110
  text "X5" at 800,16.22 h110
  text "X4" at 800,-120 h110
  text "X3" at 800,-254.78 h110
  text "X2" at 800,-396 h110
  text "DVDD" at -1432,-517 h60
  text "X1" at 800,-536 h110
  text "VDD" at -1422.94,-826 h60
  text "Remove J5 / for pick-up / high sensitivity" at 382,-1022 h60
  text "PU    RS&OC" at 295,-1342.92 h65
  text "DVDD  GND" at -550.83,-1414.36 h60 r345
  text "J2A / J2B / J2C / J2D" at 154,-1551 h65
  text "OFF    ON / OFF    OFF / OFF    ON / ON     OFF" at 287,-1555 h65
  text "ON            OFF" at -223,-1641.42 h70
Bottom Assembly:
  drawing of 179 lines, arcs and shapes, not listed
Mechanical 13:
  drawing of 182 lines, arcs and shapes, not listed

## Text inside footprints (layer, text, board x,y; h text height)
BH1: Top Overlay "-" at -204.61,-1127 h500 r180; Top Overlay "+" at -910.61,-1209 h250 r270